# Altium PCB Motherboard Right.PcbDoc
Units mil, origin at the board's own origin, x right, y up, seen from the top; angles counter-clockwise.
Board outline 5470 x 4386.98 mil, 2 copper layers (Top Layer, Bottom Layer), stack 39.4 mil thick; 68 components, 42 nets, 293 pads, 53 vias.
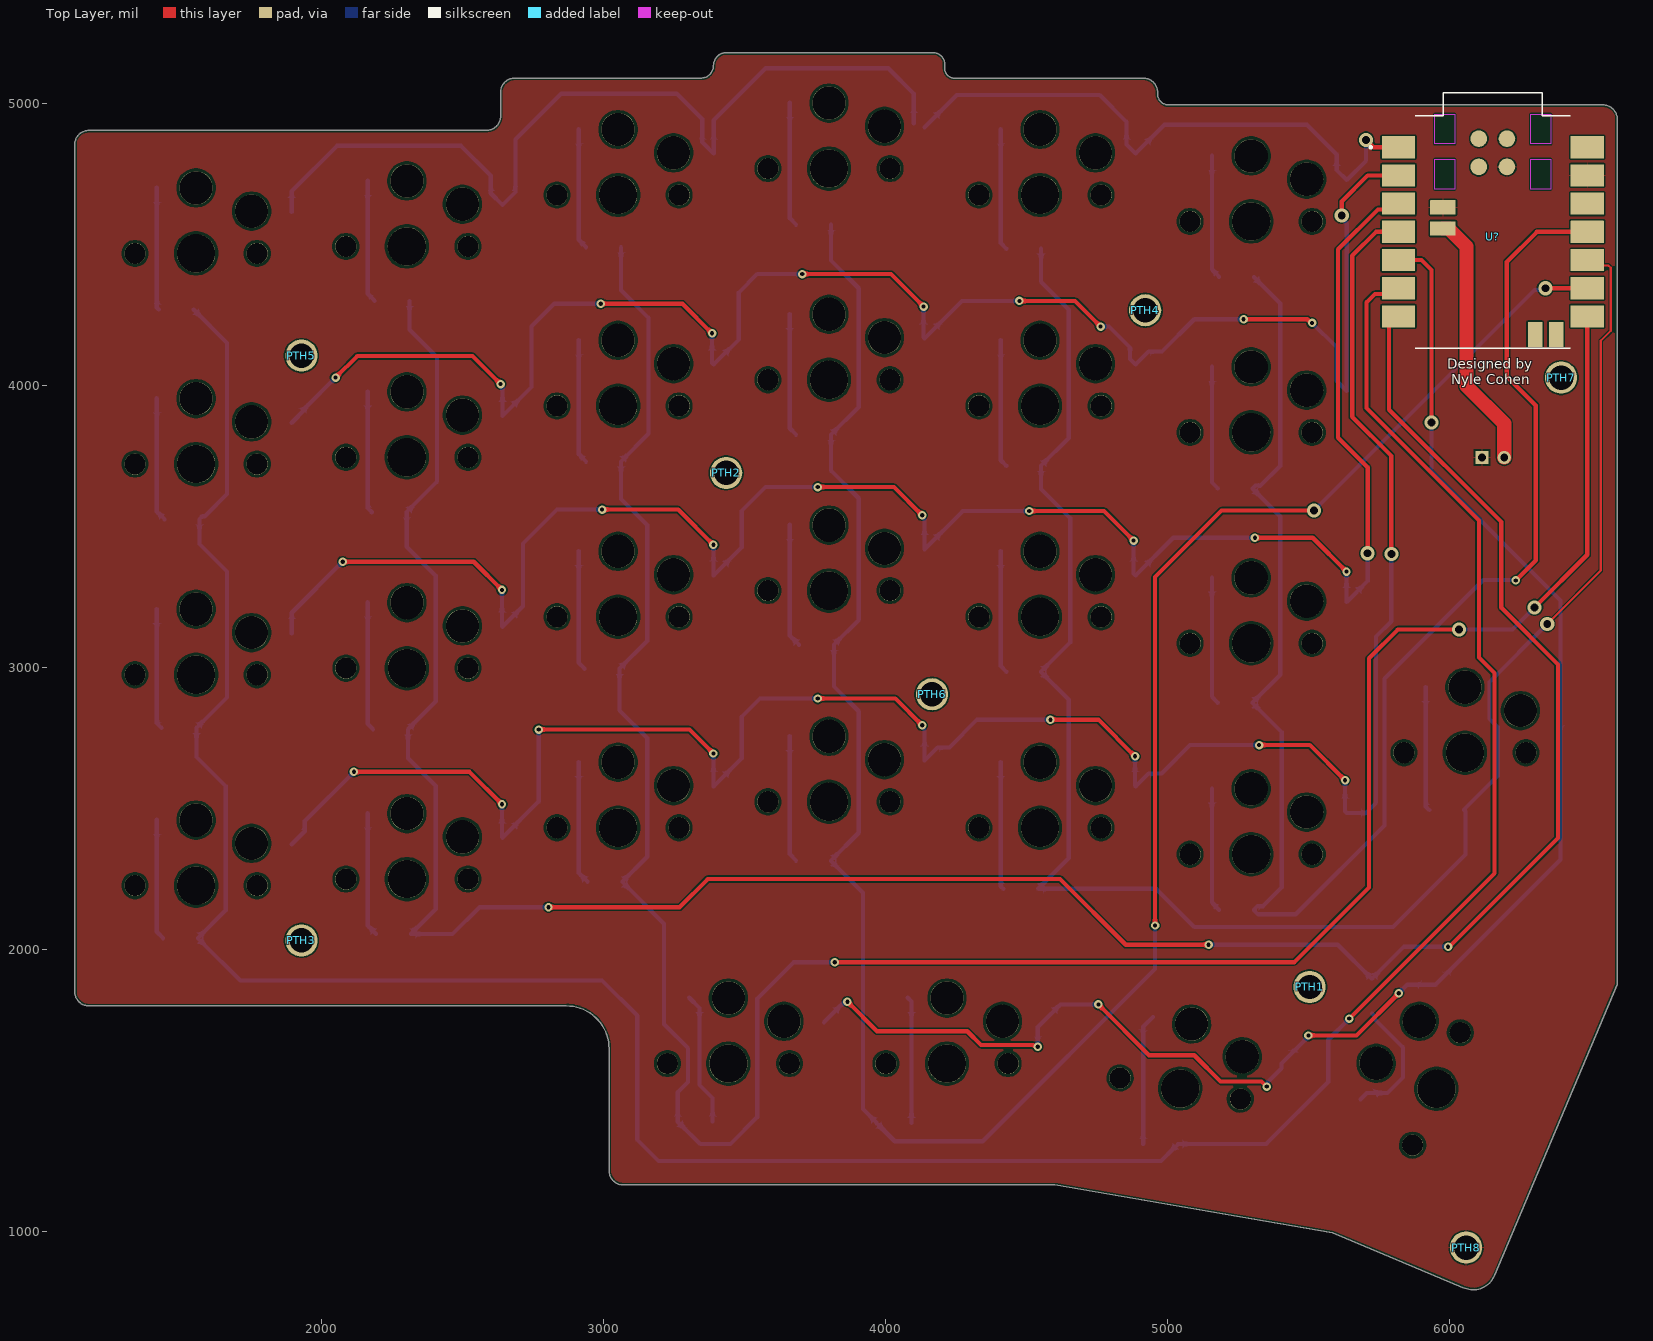
[diagram p0: Top Layer view]
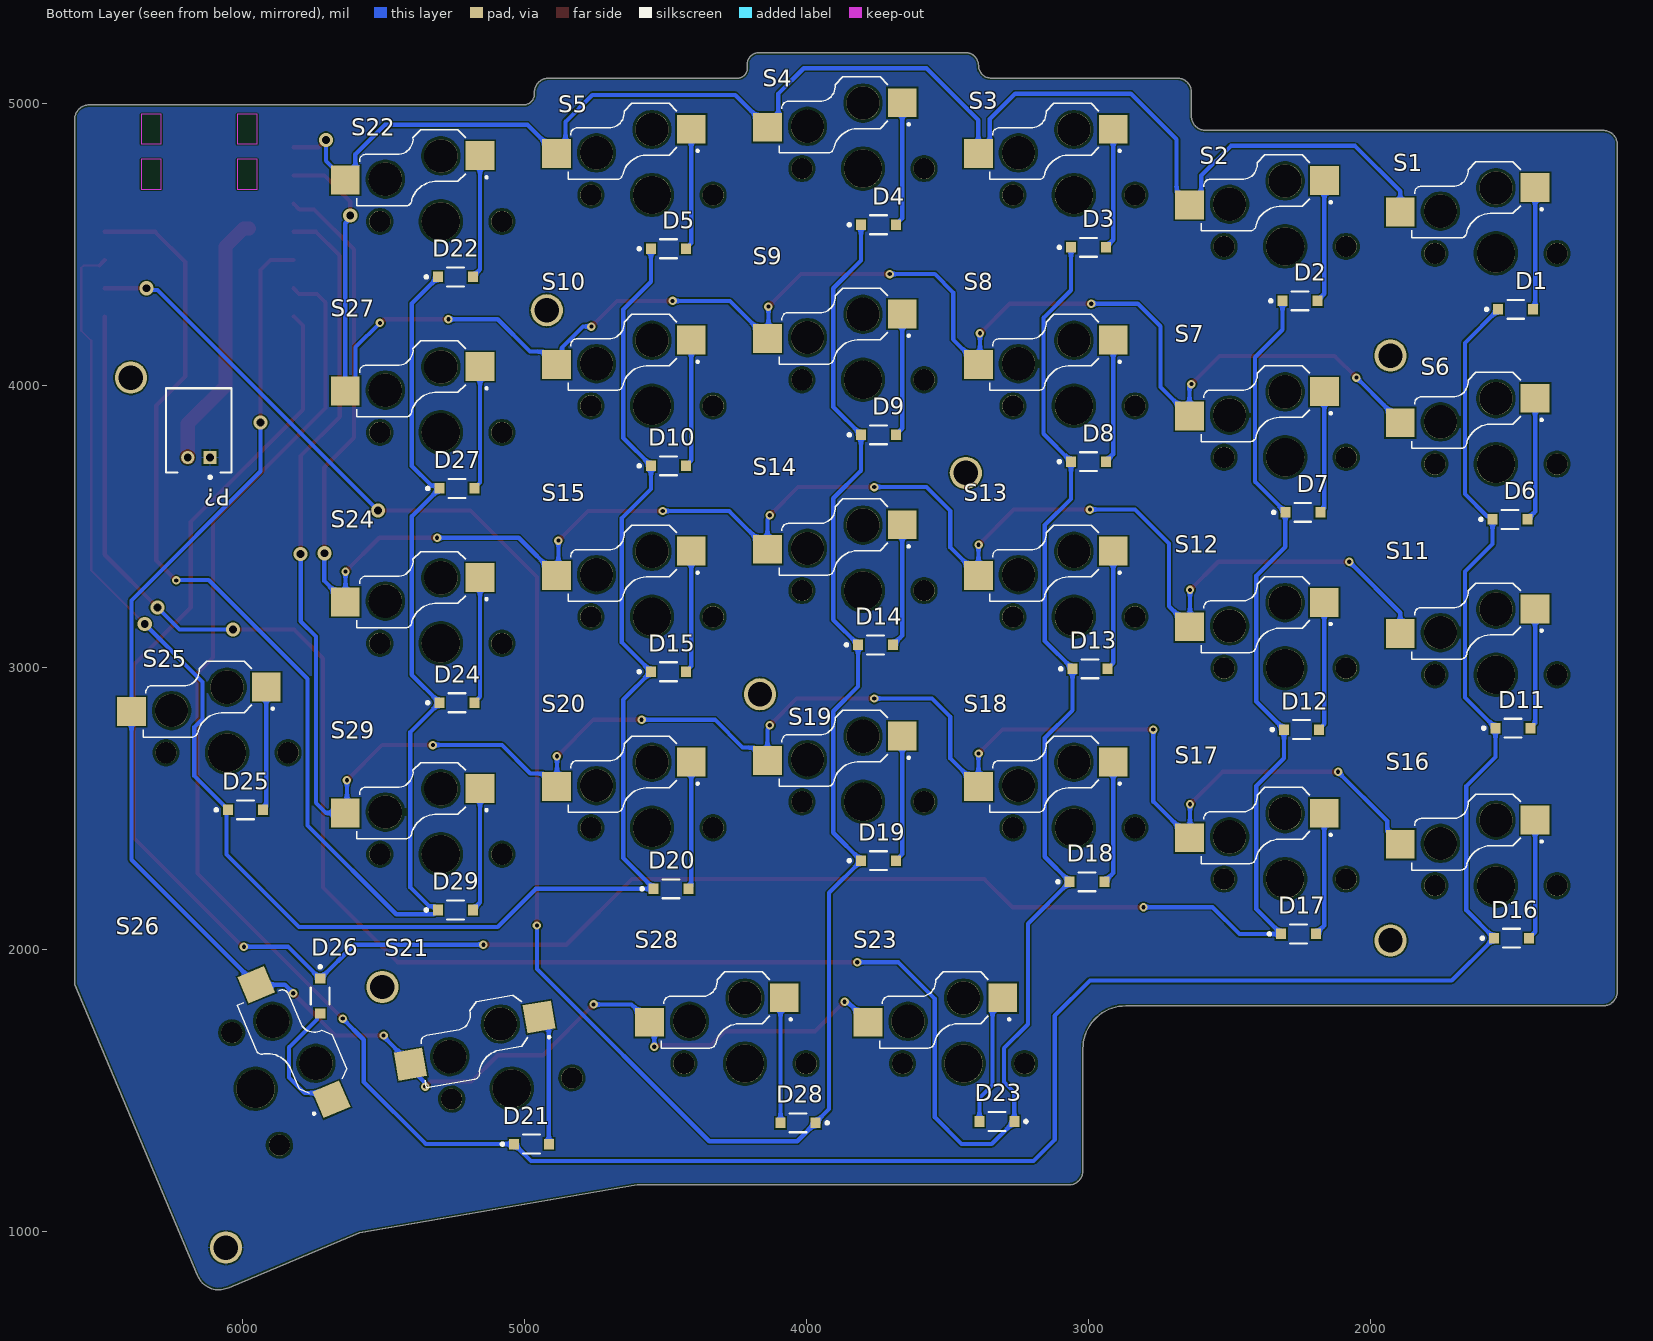
[diagram p1: Bottom Layer view, seen from below]
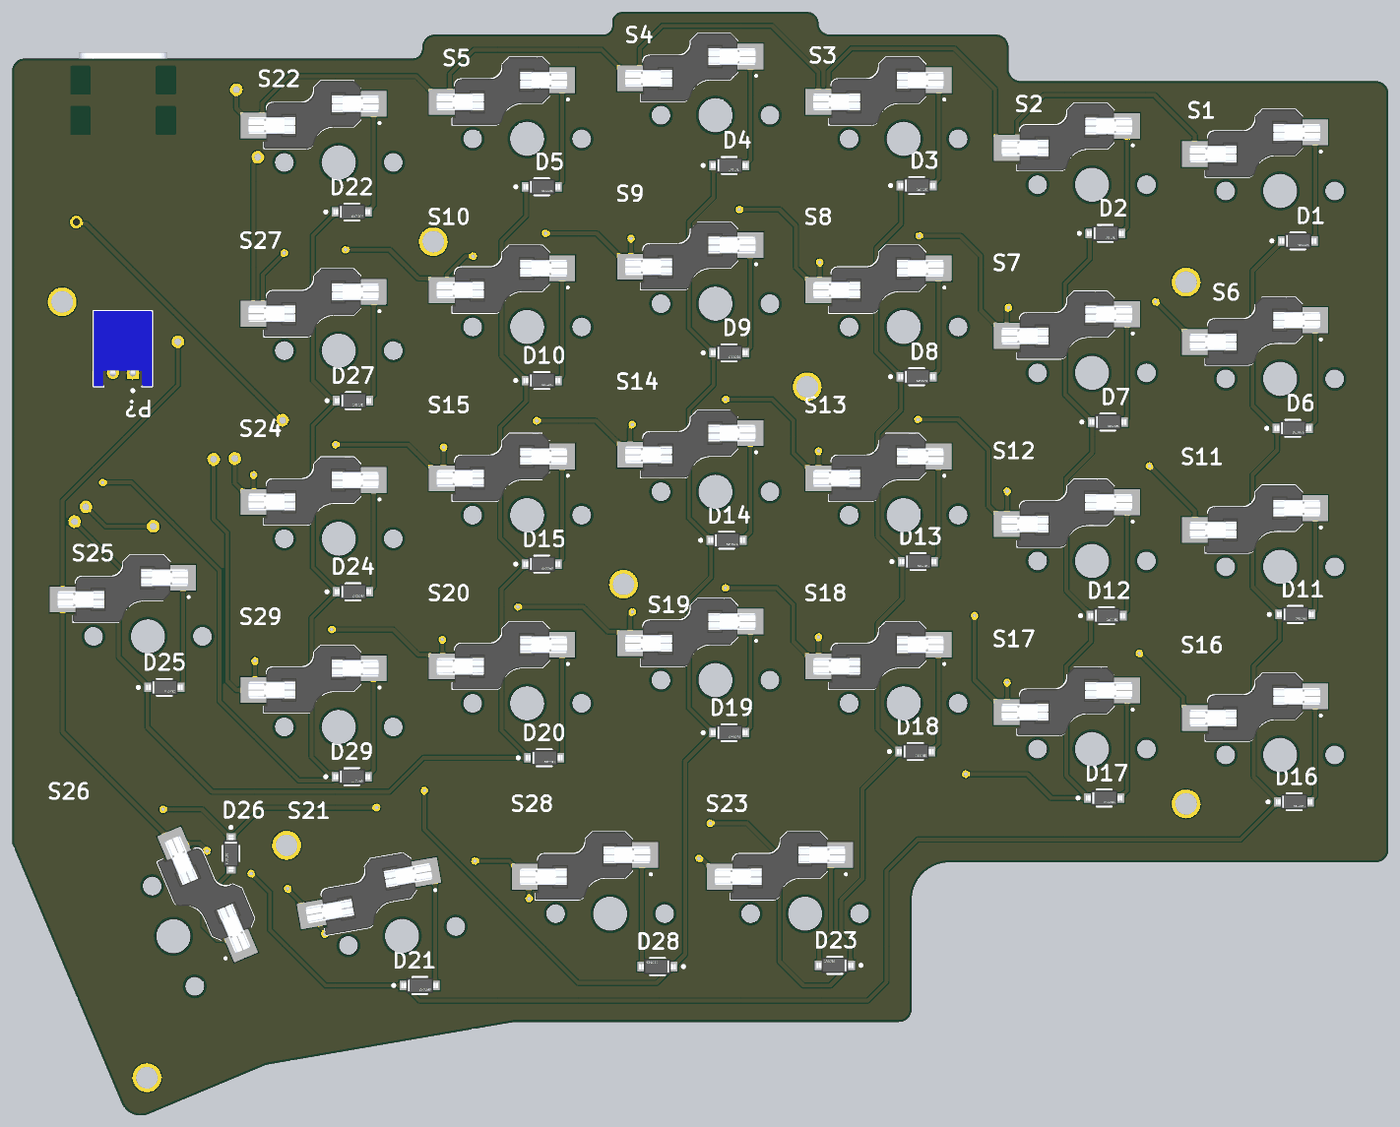
[diagram p2: 3D render of the assembled board from below, using the file's embedded part models]

## Layer stack, top to bottom
Top Solder: solder mask 0.4, Solder Resist, Dk 3.5
Top Layer: signal copper 1.4
Dielectric 1: dielectric 36.6, FR-4, Dk 4.4
Bottom Layer: signal copper 1.4
Bottom Solder: solder mask 0.4, Solder Resist, Dk 3.5

## Board outline
1175,1800 cw(c1175,1850) 1125,1850 1125,4855 cw(c1175,4855) 1175,4905 2585,4905 ccw(c2585,4955) 2635,4955 2635,5040 cw(c2685,5040) 2685,5090 3345,5090 ccw(c3345,5135) 3390,5135 cw(c3435,5135) 3435,5180 4170,5180 cw(c4170,5140) 4210,5140 4210,5125 ccw(c4245,5125) 4245,5090 4915,5090 cw(c4915,5040) 4965,5040 4965,5035 ccw(c5005,5035) 5005,4995 6545,4995 cw(c6545,4945) 6595,4945 6595,1876.24 6160.46,845.21 cw(c6084,875.08) 6048.51,801.07 5585,995 4600,1165 3070,1165 cw(c3070,1215) 3020,1215 3020,1647.95 ccw(c2867.95,1647.95) 2867.95,1800

## Design rules (kind name [scope] priority, off if disabled: settings)
BoardOutlineClearance [All] p1: gap=7.87 ignorepadtopadclearanceinfootprint=FALSE
Clearance [All] p1: gap=5 ignorepadtopadclearanceinfootprint=TRUE except(10: Arc-Hole Track-Hole SMDPad-Hole THPad-Hole Via-Hole Fill-Hole Poly-Hole Region-Hole Text-Hole)
ComponentClearance [All] p1: gap=5 collisioncheckmode=3 verticalgap=5 showdistances=TRUE
DiffPairsRouting [All] p1: maxlimit=100 minlimit=5 mostfreqgap=9.37 toplayer_minwidth=5 toplayer_maxwidth=100 toplayer_prefwidth=31.57 bottomlayer_minwidth=5 bottomlayer_maxwidth=100 bottomlayer_prefwidth=31.57 impedanceprofiledriven=TRUE impedanceprofileid={D4E62B93-00E1-4489-9EE8-131CB804B821} impedanceprofilevalue=90.000000 maxuncoupledlength=500
Height [All] p1: minheight=0 maxheight=71497.94 prefheight=500
HoleSize [All] p1: absolutevalues=TRUE maxlimit=248.03 minlimit=11.81 maxpercent=80.000 minpercent=20.000
HoleToHoleClearance [All] p1: gap=10 allowstackedmicrovias=FALSE
MinimumAnnularRing [All] p1: minimumring=6
MinimumSolderMaskSliver [All] p1: minsoldermaskwidth=6
PlaneClearance [All] p1: clearance=5
PlaneConnect PlaneConnectPowerPads [InPadClass('PowerPads')] p1: planeconnectstyle=Direct reliefexpansion=20 reliefentries=4 reliefconductorwidth=10 reliefairgap=10
PlaneConnect [All] p2: pad.planeconnectstyle=Relief pad.reliefexpansion=11.81 pad.reliefentries=4 pad.reliefconductorwidth=5 pad.reliefairgap=5 via.planeconnectstyle=Direct via.reliefexpansion=11.81 via.reliefentries=4 via.reliefconductorwidth=5 via.reliefairgap=5
PolygonConnect PolygonConnectPowerPads [All vs (InPadClass('PowerPads'))] p1: connectstyle=Direct reliefconductorwidth=10 reliefentries=4 polygonreliefangle="90 Angle" airgapwidth=10
PolygonConnect [All] p2: thpad.connectstyle=Relief thpad.reliefconductorwidth=5 thpad.reliefentries=4 thpad.polygonreliefangle="90 Angle" thpad.airgapwidth=5 smdpad.connectstyle=Relief smdpad.reliefconductorwidth=5 smdpad.reliefentries=4 smdpad.polygonreliefangle="90 Angle" smdpad.airgapwidth=5 via.connectstyle=Direct via.reliefconductorwidth=5 via.reliefentries=4 via.polygonreliefangle="90 Angle" via.airgapwidth=5
RoutingVias [All] p1: holewidth=11.81 width=23.62 viastyle="Through Hole" minholewidth=11.81 minwidth=23.62 maxholewidth=23.62 maxwidth=259.84
SilkToSilkClearance [All] p1: silktosilkclearance=5
SilkToSolderMaskClearance [IsPad] p1: minsilkscreentomaskgap=5 clearancetoexposedcopper=TRUE
SolderMaskExpansion [All] p1: expansion=2 istentingtop=FALSE
SupplyNets "Schematic Supply Nets_2" [InNet('GND')] p1: voltage=0.000
UnRoutedNet [All] p1: checkbadconnections=TRUE
Width Width_10mil [All] p1: maxlimit=1000 minlimit=8 preferedwidth=10 minimp=50.000000 maximp=50.000000 favimp=50.000000
Width Width_6mil [All] p2: maxlimit=1000 minlimit=6 preferedwidth=6 minimp=50.000000 maximp=50.000000 favimp=50.000000
Width Power_20mil [All] p3: maxlimit=1000 minlimit=20 preferedwidth=20 minimp=50.000000 maximp=50.000000 favimp=50.000000
Width Power_12mil [All] p4: maxlimit=1000 minlimit=12 preferedwidth=12 minimp=50.000000 maximp=50.000000 favimp=50.000000
Width Width_5mil [All] p5: maxlimit=1000 minlimit=5 preferedwidth=5 minimp=50.000000 maximp=50.000000 favimp=50.000000
Width [All] p6: maxlimit=100 minlimit=5 preferedwidth=10 minimp=50.000000 maximp=50.000000 favimp=50.000000
19 further rules are at their usual default settings.

## Classes and differential pairs
component class RP2040: P? U?

## Components (designator, comment, footprint, x,y, rotation, side; value= is the part's Value field where it differs from the comment)
D1 "1N4148W-13-F" FP-SOD123-MFG 1485,4270 r180 bottom value=2pF
D2 "1N4148W-13-F" FP-SOD123-MFG 2250,4300 r180 bottom value=2pF
D3 "1N4148W-13-F" FP-SOD123-MFG 3000,4490 r180 bottom value=2pF
D4 "1N4148W-13-F" FP-SOD123-MFG 3745,4570 r180 bottom value=2pF
D5 "1N4148W-13-F" FP-SOD123-MFG 4490,4485 r180 bottom value=2pF
D6 "1N4148W-13-F" FP-SOD123-MFG 1505,3525 r180 bottom value=2pF
D7 "1N4148W-13-F" FP-SOD123-MFG 2240,3550 r180 bottom value=2pF
D8 "1N4148W-13-F" FP-SOD123-MFG 3000,3730 r180 bottom value=2pF
D9 "1N4148W-13-F" FP-SOD123-MFG 3745,3825 r180 bottom value=2pF
D10 "1N4148W-13-F" FP-SOD123-MFG 4490,3715 r180 bottom value=2pF
D11 "1N4148W-13-F" FP-SOD123-MFG 1495,2785 r180 bottom value=2pF
D12 "1N4148W-13-F" FP-SOD123-MFG 2245,2780 r180 bottom value=2pF
D13 "1N4148W-13-F" FP-SOD123-MFG 2995,2995 r180 bottom value=2pF
D14 "1N4148W-13-F" FP-SOD123-MFG 3755,3080 r180 bottom value=2pF
D15 "1N4148W-13-F" FP-SOD123-MFG 4490,2985 r180 bottom value=2pF
D16 "1N4148W-13-F" FP-SOD123-MFG 1500,2040 r180 bottom value=2pF
D17 "1N4148W-13-F" FP-SOD123-MFG 2255,2055 r180 bottom value=2pF
D18 "1N4148W-13-F" FP-SOD123-MFG 3005,2240 r180 bottom value=2pF
D19 "1N4148W-13-F" FP-SOD123-MFG 3745,2315 r180 bottom value=2pF
D20 "1N4148W-13-F" FP-SOD123-MFG 4480,2215 r180 bottom value=2pF
D21 "1N4148W-13-F" FP-SOD123-MFG 4975,1310 r180 bottom value=2pF
D22 "1N4148W-13-F" FP-SOD123-MFG 5245,4385 r180 bottom value=2pF
D23 "1N4148W-13-F" FP-SOD123-MFG 3325,1390 r0 bottom value=2pF
D24 "1N4148W-13-F" FP-SOD123-MFG 5240,2875 r180 bottom value=2pF
D25 "1N4148W-13-F" FP-SOD123-MFG 5990,2495 r180 bottom value=2pF
D26 "1N4148W-13-F" FP-SOD123-MFG 5725,1835 r270 bottom value=2pF
D27 "1N4148W-13-F" FP-SOD123-MFG 5240,3635 r180 bottom value=2pF
D28 "1N4148W-13-F" FP-SOD123-MFG 4030,1385 r0 bottom value=2pF
D29 "1N4148W-13-F" FP-SOD123-MFG 5245,2140 r180 bottom value=2pF
P? "S2B-PH-K-S(LF)(SN)" JST-S2B-PH-K-S_V 6155,3841 r0 bottom
PTH1 "M2_Mount" Mounting_Holes#1 5565,1870 r90 top
PTH2 "M2_Mount" Mounting_Holes#2 3435,3690 r90 top
PTH3 "M2_Mount" Mounting_Holes#3 1885,2040 r90 top
PTH4 "M2_Mount" Mounting_Holes#4 5490,4410 r90 top
PTH5 "M2_Mount" Mounting_Holes#5 1870,4205 r90 top
PTH6 "M2_Mount" Mounting_Holes#6 4150,2980 r90 top
PTH7 "M2_Mount" Mounting_Holes#2 6396,4028 r90 top
PTH8 "M2_Mount" Mounting_Holes#2 6059,943 r90 top
S1 "5118" SW_5118 1555.12,4468.5 r0 bottom
S2 "5118" SW_5118 2302.83,4493.19 r0 bottom
S3 "5118" SW_5118 3051.55,4675.69 r0 bottom
S4 "5118" SW_5118 3799.65,4769.44 r0 bottom
S5 "5118" SW_5118 4547.98,4675.69 r0 bottom
S6 "5118" SW_5118 1555.12,3721.5 r0 bottom
S7 "5118" SW_5118 2302.83,3745.39 r0 bottom
S8 "5118" SW_5118 3051.55,3927.72 r0 bottom
S9 "5118" SW_5118 3799.65,4020.39 r0 bottom
S10 "5118" SW_5118 4547.98,3927.72 r0 bottom
S11 "5118" SW_5118 1555.12,2974.31 r0 bottom
S12 "5118" SW_5118 2303,2997.72 r0 bottom
S13 "5118" SW_5118 3051.55,3179.72 r0 bottom
S14 "5118" SW_5118 3799.65,3272.72 r0 bottom
S15 "5118" SW_5118 4547.98,3179.72 r0 bottom
S16 "5118" SW_5118 1555.12,2226.39 r0 bottom
S17 "5118" SW_5118 2303,2249.72 r0 bottom
S18 "5118" SW_5118 3051.55,2431.72 r0 bottom
S19 "5118" SW_5118 3799.65,2523.72 r0 bottom
S20 "5118" SW_5118 4547.98,2431.69 r0 bottom
S21 "5118" SW_5118 5045.16,1506.85 r350 bottom
S22 "5118" SW_5118 5296.7,4581.94 r0 bottom
S23 "5118" SW_5118 3443.15,1595.39 r0 bottom
S24 "5118" SW_5118 5296.7,3085.72 r0 bottom
S25 "5118" SW_5118 6055,2697.72 r0 bottom
S26 "5118" SW_5118 5953.81,1505.65 r67 bottom
S27 "5118" SW_5118 5296.7,3833.72 r0 bottom
S28 "5118" SW_5118 4218.15,1595.39 r0 bottom
S29 "5118" SW_5118 5296.7,2337.72 r0 bottom
U? "102010448" MODULE_102010448 6154,4545 r0 top

## Footprints (in the part's own frame and the unit in brackets; to place one, negate y for a bottom-side part, rotate by r counter-clockwise, add the part's x,y. Pads: shape width x height; smd on the part's side, far side on the other; paste and mask are expansions set on the pad)
FP-SOD123-MFG [mm]
  rect 0.9x0.95 smd paste+0 mask+0: 1(-1.575,0) 2(1.575,0)
  silkscreen extent -2.75,-0.85 0.75,0.85, body extent -1.85,-0.77 1.85,0.77, height 1.45
JST-S2B-PH-K-S_V [mm] "THD, 2-Leads, Body 7.6x5.9mm, Pitch 2mm"
  rect 1.2x1.2 hole 0.7: 1(-1,2.45)
  round 1.2 hole 0.7: 2(1,2.45)
  silkscreen extent -2.95,-3.8 2.95,4.35, body extent -2.95,-3.8 2.95,3.8, height 4.8
MODULE_102010448 [mm]
  rrect3% 3x2 smd: 0(-8.5,7.62) 1(-8.5,5.08) 2(-8.5,2.54) 3(-8.5,0) 3V3(8.5,2.54) 4(-8.5,-2.54) 5(-8.5,-5.08) 6(-8.5,-7.62) 7(8.5,-7.62) 8(8.5,-5.08) 9(8.5,-2.54) 10(8.5,0) GND(8.5,5.08) VUSB(8.5,7.62)
  rrect4% 2.3x1.3 smd: BAT_N(-4.5,2.2) BAT_P(-4.5,0.3)
  rrect4% 1.3x2.3 smd: NFC1(3.8,-9.25) NFC2(5.7,-9.25)
  round 1.5 smd: TP1(1.27,5.85) TP2(-1.27,5.85) TP3(1.27,8.39) TP5(-1.27,8.39)
  Keep-Out Layer region: 5.197,7.915 3.419,7.915 3.419,10.582 5.197,10.582
  Keep-Out Layer region: 5.197,3.851 3.419,3.851 3.419,6.518 5.197,6.518
  Keep-Out Layer region: -3.439,3.851 -5.217,3.851 -5.217,6.518 -3.439,6.518
  Keep-Out Layer region: -3.439,7.915 -5.217,7.915 -5.217,10.582 -3.439,10.582
  silkscreen extent -11.1,-10.48 6.98,12.52, body extent -8.89,-10.48 8.89,12, height 4.46
Mounting_Holes#1 [mm]
  round 2.9 hole 2.2: 1(-0.076,1.549)
Mounting_Holes#2 [mm]
  round 2.9 hole 2.2: 1(0,0)
Mounting_Holes#3 [mm]
  round 2.9 hole 2.2: 1(-0.203,-1.118)
Mounting_Holes#4 [mm]
  round 2.9 hole 2.2: 1(-3.632,14.453)
Mounting_Holes#5 [mm]
  round 2.9 hole 2.2: 1(-2.515,-1.499)
Mounting_Holes#6 [mm]
  round 2.9 hole 2.2: 1(-1.905,-0.381)
SW_5118 [mm]
  rect 2.6x2.6 smd: 1(-3.535,-5.926) 2(8.615,-3.726)
  round 1.902 hole 1.902 unplated: ""(-5.5,0) ""(5.5,0)
  round 3 hole 3 unplated: ""(0,-5.9) ""(5,-3.8)
  round 3.452 hole 3.452 unplated: ""(0,0)
  silkscreen extent -4.21,-8.25 7.56,-1.4, body extent -4.04,-8.25 9.12,-1.4, height 1.85

## Part data
D1 D2 D3 D4 D5 D6 D7 D8 D9 D10 D11 D12 D13 D14 D15 D16 D17 D18 D19 D20 D21 D22 D23 D24 D25 D26 D27 D28 D29: library part CMP-12791-000005-1, "DIODE GEN PURP 100V 150MA SOD123", Capacitance=2pF, Forward Current=300mA, Manufacturer="Diodes Inc.", Max Junction Temp=+150°C, Max Repetitive Reverse Voltage=100V, Max Surge Forward Current=1A, Package=SOD123, Peak Reverse Current=1uA, Temperature="-65°C to +150°C", Temperature Range Low=-65°C, Automotive=No, Category=Diode, ComponentLink2Description=Datasheet, ComponentLink2URL=https://upverter.com/datasheet/628e7d6fee5901eee6eef4567d1c3569f2cd3cde.pdf, Device Class L1="Discrete Semiconductors", Device Class L2=Diodes, Device Class L3="Rectifier Diodes", Digikey Description="DIODE GEN PURP 100V 150MA SOD123", Footprint Url=https://www.diodes.com/assets/Package-Files/SOD123.pdf, Height=1.45mm, Lead Free=Yes, Manufacturer Part Number=1N4148W-13-F, Mouser Description="1N4148W Series 2 A 100 V 400 mW Surface Mount Fast Switching Diode - SOD-123", Octopart=https://octopart.com/1n4148w-13-f-diodes+inc.-2359612, Reverse Voltage=100V, RoHS=TRUE, Standoff Height=0mm, Temperature Range High=+150°C
P?: library part CMP-1755-00004-1, "Male Header, Pitch 2 mm, 1 x 2 Position, Height 4.8 mm, Tail Length 3.4 mm, -25 to 85 degC, RoHS, Bulk", Capacitance="10 uF", Case\Package=Radial, Max Operating Temperature="85 degC", Min Operating Temperature="-40 degC", Package Quantity=200, Tolerance=20%, Voltage Rating="50 V", ComponentLink1Description=Datasheet, ComponentLink1URL=http://www.jst-mfg.com/product/pdf/eng/ePH.pdf, DatasheetVersion=Dec-12, Diameter="5 mm", Height="11 mm", Lead Pitch="2 mm", Length="11 mm", Mount="Through Hole", PackageDescription="Male Header, Pitch 2 mm, 1 x 2 Position, Height 4.8 mm, Tail Length 3.4 mm", PackageReference=S2B-PH-K-S, Packaging=Bulk, Pins=2, Radiation Hardening=No, REACH SVHC="No SVHC", RoHSCompliant=true, Voltage Rating (DC)="50 V"
S1 S2 S3 S4 S5 S6 S7 S8 S9 S10 S11 S12 S13 S14 S15 S16 S17 S18 S19 S20 S21 S22 S23 S24 S25 S26 S27 S28 S29: "SWITCH SKT FOR KAILH CHOC 1=10PC", Package="NON STANDARD-2 Adafruit", Check_prices=https://www.snapeda.com/parts/5118/Adafruit+Industries/view-part/?ref=eda, MF="Adafruit Industries LLC", MP=5118, SnapEDA_Link=https://www.snapeda.com/parts/5118/Adafruit+Industries/view-part/?ref=snap
U?: "- nRF52840 Transceiver; Bluetooth® 5.x Evaluation Board", Package=None, Check_prices=https://www.snapeda.com/parts/102010448/Seeed+Technology+Co.%252C+Ltd/view-part/?ref=eda, MF="Seeed Technology Co., Ltd", MP=102010448, SnapEDA_Link=https://www.snapeda.com/parts/102010448/Seeed+Technology+Co.%252C+Ltd/view-part/?ref=snap

## Via types
v1: diameter 30, hole 15, Top Layer to Bottom Layer, 43 vias
v2: diameter 50, hole 28, Top Layer to Bottom Layer, 10 vias

## Nets (pads, with @x,y where several pads share a name; then routed paths per layer and width w, separated by ;. In a path a pad name is that pad's centre, name@x,y a point inside that pad or via, vN(x,y) a via of type N, cw(c..) or ccw(c..) an arc to the next point about the centre after c; other vN are vias at no path point)
GND: P?.1 PTH8.1 U?.BAT_N U?.GND U?.TP1
NetD1_1: D1.1 D6.1 D11.1 D16.1 D21.1 U?.5 | length 10534.9
  Top Layer w15: v1(5645,1755) 6160,2270 6160,2980 6105,3035 6105,3521 5706,3920 5706,4295 5736,4325 5799.35,4325 U?.5
  Bottom Layer w15: D1.1 1547.01,4269.02 1665,4151.02 1665,3615 1586.2,3536.2 1577.22,3536.2 1567.01,3525.98 D6.1 1567.01,3437.99 1665,3340 1665,2893.98 1557.01,2785.98 D11.1 1557.01,2682.99 1660,2580 1660,2138.98 1562.01,2040.98 D16.1 1562.01,2039.02 1572.22,2028.8 1573.21,2028.8 1712.01,1890 2995,1890 3120,1765 3120,1325 3195,1250 4977.01,1250 5025.81,1298.8 5026.79,1298.8 5037.01,1309.02 D21.1 5350,1310 5570,1530 5570,1680 v1(5645,1755)
NetD1_2: D1.2 S1.1 | length 434.7
  Bottom Layer w15: S1.1 1415.94,4277.05 D1.2
NetD2_1: D2.1 D7.1 D12.1 D17.1 D26.1 U?.6 | length 9104.7
  Top Layer w15: v1(2805,2150) 3270,2150 3370,2250 4619,2250 4852,2017 v1(5146,2017) ; U?.6 5817.87,4245 5786,4213.13 5786,3914 6184,3516 6184,3212 6385,3011 6385,2395 6000,2010 v1(5995,2010)
  Bottom Layer w15: D2.1 2312.01,4197.99 2410,4100 2410,3658.98 2302.01,3550.98 D7.1 2302.01,3427.99 2405,3325 2405,2878.98 2307.01,2780.98 D12.1 2307.01,2677.99 2405,2580 2405,2143.98 2317.01,2055.98 D17.1 2465,2055 2560,2150 v1(2805,2150) ; v1(5146,2017) 5604.02,2017 5724.02,1897.01 5725.98,1897.01 5838.98,2010 v1(5995,2010)
NetD2_2: D2.2 S2.1 | length 436.6
  Bottom Layer w15: S2.1 2163.66,4325.31 2187.99,4300.98 D2.2
NetD3_1: D3.1 D8.1 D13.1 D18.1 D23.1 U?.7 | length 9141.7
  Top Layer w15: v1(3820,1955) 5450,1955 5715,2220 5715,3033 5817,3135 v2(6034,3135) ; v2(6302,3213) 6488.65,3399.65 U?.7
  Bottom Layer w15: D3.1 3062.01,4337.99 3160,4240 3160,3828.98 3062.01,3730.98 D8.1 3062.01,3597.99 3155,3505 3155,3093.98 3057.01,2995.98 D13.1 3057.01,2847.99 3155,2750 3155,2328.98 3067.01,2240.98 D18.1 3067.01,2239.02 3215,2091.02 3215,1735 3300,1650 3300,1530.35 3262.99,1493.35 D23.1 3262.99,1389.02 3275.71,1376.3 3276.69,1376.3 3342.99,1310 3450,1310 3545,1405 3545,1825 3675,1955 v1(3820,1955) ; v2(6034,3135) 6224,3135 v2(6302,3213)
NetD3_2: D3.2 S3.1 | length 429.6
  Bottom Layer w15: S3.1 2912.38,4516.6 2937.99,4490.98 D3.2
NetD4_1: D4.1 D9.1 D14.1 D19.1 D28.1 U?.8 | length 8102.3
  Top Layer w15: v1(4956,2085) 4956,3321 5192,3557 v2(5520,3557) ; v2(6340,4345) U?.8
  Bottom Layer w15: D4.1 3807.01,4442.99 3905,4345 3905,3923.98 3807.01,3825.98 D9.1 3807.01,3697.99 3905,3600 3905,3168.98 3817.01,3080.98 D14.1 3817.01,2932.99 3905,2845 3905,2413.98 3807.01,2315.98 D19.1 3807.01,2314.02 3920,2201.02 3920,1433.98 3967.99,1385.98 D28.1 3967.99,1384.02 3980.71,1371.3 3981.69,1371.3 4032.99,1320 4345,1320 4956,1931 v1(4956,2085) ; v2(5520,3557) 6301.3,4338.3 6333.3,4338.3 v2(6340,4345)
NetD4_2: D4.2 S4.1 | length 442.1
  Bottom Layer w15: S4.1 3660.47,4593.5 3682.99,4570.98 D4.2
NetD5_1: D5.1 D10.1 D15.1 D20.1 D25.1 U?.9 | length 6615.7
  Top Layer w8: v2(6347,3154) 6537,3344 6537,4159 6572,4194 6572,4417.21 6563.21,4426 U?.9@6507.65,4426
  Top Layer w15: U?.9 U?.9@6507.65,4426
  Bottom Layer w15: D5.1 4552.01,4367.99 4650,4270 4650,3813.98 4552.01,3715.98 D10.1 4552.01,3632.99 4655,3530 4655,3088.98 4552.01,2985.98 D15.1 4552.01,2984.02 4650,2886.02 4650,2323.98 4542.01,2215.98 D20.1 4960,2215 5095,2080 5800,2080 6057.01,2337.01 6057.01,2490 D25.1 6052.01,2495.98 6171,2614.98 6171,2789 6142,2818 6142,2949 v2(6347,3154)
NetD5_2: D5.2 S5.1 | length 431.9
  Bottom Layer w15: S5.1 4408.81,4505.17 4427.99,4485.98 D5.2
NetD6_2: D6.2 S6.1 | length 441
  Bottom Layer w15: S6.1 1415.94,3553.03 1442.99,3525.98 D6.2
NetD7_2: D7.2 S7.1 | length 434.6
  Bottom Layer w15: S7.1 2163.66,3565.31 2177.99,3550.98 D7.2
NetD8_2: D8.2 S8.1 | length 441.6
  Bottom Layer w15: S8.1 2912.38,3756.6 2937.99,3730.98 D8.2
NetD9_2: D9.2 S9.1 | length 438
  Bottom Layer w15: S9.1 3660.47,3848.5 3682.99,3825.98 D9.2
NetD10_2: D10.2 S10.1 | length 454
  Bottom Layer w15: S10.1 4408.81,3735.17 4427.99,3715.98 D10.2
NetD11_2: D11.2 S11.1 | length 429.7
  Bottom Layer w15: S11.1 1415.94,2803.03 1432.99,2785.98 D11.2
NetD12_2: D12.2 S12.1 | length 459
  Bottom Layer w15: S12.1 2163.83,2800.15 2182.99,2780.98 D12.2
NetD13_2: D13.2 S13.1 | length 426.6
  Bottom Layer w15: S13.1 2912.38,3016.6 2932.99,2995.98 D13.2
NetD14_2: D14.2 S14.1 | length 439.5
  Bottom Layer w15: S14.1 3660.47,3113.5 3692.99,3080.98 D14.2
NetD15_2: D15.2 S15.1 | length 436
  Bottom Layer w15: S15.1 4408.81,3005.16 4427.99,2985.98 D15.2
NetD16_2: D16.2 S16.1 | length 428.8
  Bottom Layer w15: S16.1 1415.94,2063.03 1437.99,2040.98 D16.2
NetD17_2: D17.2 S17.1 | length 440.1
  Bottom Layer w15: S17.1 2163.83,2085.15 2192.99,2055.98 D17.2
NetD18_2: D18.2 S18.1 | length 437.7
  Bottom Layer w15: S18.1 2912.38,2271.6 2942.99,2240.98 D18.2
NetD19_2: D19.2 S19.1 | length 451.4
  Bottom Layer w15: S19.1 3660.47,2338.5 3682.99,2315.98 D19.2
NetD20_2: D20.2 S20.1 | length 453.8
  Bottom Layer w15: S20.1 4408.81,2224.18 D20.2
NetD21_2: D21.2 S21.1 | length 465.5
  Bottom Layer w15: D21.2 4913.8,1310.8 4913.8,1725.96 S21.1
NetD22_1: D22.1 D24.1 D27.1 D29.1 U?.10 | length 5771.9
  Top Layer w15: v1(6235,3309) 6306,3380 6306,3929 6203,4032 6203,4438 6310,4545 U?.10
  Bottom Layer w15: D22.1 5307.01,4384.02 5400,4291.02 5400,3715 5330,3645 5312.01,3645 D27.1 5302.01,3634.02 5400,3536.02 5400,2973.98 5302.01,2875.98 D24.1 5302.01,2874.02 5405,2771.02 5405,2220 5338.7,2153.7 5319.72,2153.7 5307.01,2140.98 D29.1 5307.01,2139.02 5319.72,2126.3 5320.71,2126.3 5322.01,2125 5455,2125 5770,2440 5770,2960 6120,3310 6234,3310 v1(6235,3309)
NetD22_2: D22.2 S22.1 | length 440.8
  Bottom Layer w15: S22.1 5157.53,4411.45 5182.99,4385.98 D22.2
NetD23_2: D23.2 S23.1 | length 473.1
  Bottom Layer w15: S23.1 3340,1792.68 3340,1520 3387.01,1472.99 D23.2
NetD24_2: D24.2 S24.1 | length 452.5
  Bottom Layer w15: S24.1 5157.53,2896.45 5177.99,2875.98 D24.2
NetD25_2: D25.2 S25.1 | length 441.1
  Bottom Layer w15: S25.1 5915.83,2507.17 D25.2
NetD26_2: D26.2 S26.1 | length 455.5
  Bottom Layer w15: S26.1 5706.79,1490.82 5779.82,1490.82 5835,1546 5835,1653 5736.2,1751.8 5736.2,1762.78 5725.98,1772.99 D26.2
NetD27_2: D27.2 S27.1 | length 440.5
  Bottom Layer w15: S27.1 5157.53,3656.45 5177.99,3635.98 D27.2
NetD28_2: D28.2 S28.1 | length 449.1
  Bottom Layer w15: S28.1 4092.01,1815.67 D28.2
NetD29_2: D29.2 S29.1 | length 441.6
  Bottom Layer w15: S29.1 5157.53,2166.45 5182.99,2140.98 D29.2
NetP?_2: P?.2 U?.BAT_P | length 913.9
  Top Layer w50: U?.BAT_P 5996.52,4556.81 6061,4492.33 6061,3998 6194.37,3864.63 P?.2
NetS1_2: S1.2 S2.2 S3.2 S4.2 S5.2 S22.2 U?.0 | length 5347.1
  Top Layer w15: v2(5704,4871) 5704.29,4871 5730.29,4845 U?.0
  Bottom Layer w15: S1.2 1894.29,4689.29 2055,4850 2495,4850 2600,4745 2600,4681.89 S2.2 2688.19,4686.06 2688.19,4873.19 2850,5035 3260,5035 3350,4945 3350,4863.11 S3.2 3390.72,4940.72 3575,5125 4010,5125 4100,5035 S4.2@4100,4930 ; S4.2 4252.69,5030 4760,5030 4855,4935 4855,4854.54 S5.2 4989.78,4925 5495,4925 5600,4820 5600,4764.5 S22.2 5704,4796.76 v2(5704,4871)
NetS6_2: S6.2 S7.2 S8.2 S9.2 S10.2 S27.2 U?.1 | length 6155.4
  Top Layer w15: v1(2050,4028) 2127,4105 2535,4105 v1(2635,4005) ; v1(2990,4290) 3280,4290 v1(3385,4185) ; v1(3705,4395) 4020,4395 v1(4135,4280) ; v1(4475,4300) 4672,4300 v1(4763,4209) ; v1(5270,4235) 5495.94,4235 5508.94,4222 v1(5513,4222) ; v2(5618,4603) 5618,4653 5710,4745 U?.1
  Bottom Layer w15: S6.2 1940.47,3914.37 1940.47,3918.47 v1(2050,4028) ; v1(2635,4005) 2635,3999.59 2642.01,3992.58 S7.2 2745,3995.08 2745,4210 2825,4290 v1(2990,4290) ; v1(3385,4185) 3385,4080.13 S8.2 3480,4163.69 3480,4330 3545,4395 v1(3705,4395) ; v1(4135,4280) 4135,4170.91 S9.2 4271.73,4300 v1(4475,4300) ; v1(4763,4209) 4793,4209 4867.27,4134.73 4867.27,4094.3 S10.2 4933.34,4120.59 4980.59,4120.59 5095,4235 v1(5270,4235) ; v1(5513,4222) 5599,4136 5599,4017.28 S27.2 5635.87,4575.66 5618,4593.53 v2(5618,4603)
NetS11_2: S11.2 S12.2 S13.2 S14.2 S15.2 S24.2 U?.2 | length 6922.9
  Top Layer w15: v1(2075,3375) 2540,3375 v1(2640,3275) ; v1(2995,3560) 3265,3560 v1(3390,3435) ; v1(3760,3640) 4030,3640 v1(4130,3540) ; v1(4510,3555) 4775,3555 v1(4880,3450) ; v1(5310,3460) 5515,3460 v1(5635,3340) ; v2(5710,3405) 5710,3710 5605,3815 5605,4483 5746.59,4624.59 5798.94,4624.59 U?.2
  Bottom Layer w15: S11.2 1894.29,3194.29 v1(2075,3375) ; v1(2640,3275) 2640,3146.58 S12.2 2715,3217.24 2715,3440 2835,3560 v1(2995,3560) ; v1(3390,3435) 3390,3327.13 S13.2 3490,3425.68 3490,3555 3575,3640 v1(3760,3640) ; v1(4130,3540) 4130,3534.59 4138.82,3525.77 S14.2 4274.41,3555 v1(4510,3555) ; v1(4880,3450) 4880,3333.57 S15.2 5020.75,3460 v1(5310,3460) ; v1(5635,3340) 5635,3233.28 S24.2 5710,3306.54 v2(5710,3405)
NetS16_2: S16.2 S17.2 S18.2 S19.2 S20.2 S29.2 U?.3 | length 7650.5
  Top Layer w15: v1(2115,2630) 2525,2630 v1(2640,2515) ; v1(2770,2780) 3305,2780 v1(3390,2695) ; v1(3760,2890) 4035,2890 v1(4130,2795) ; v1(4585,2815) 4755,2815 v1(4885,2685) ; v1(5325,2725) 5505,2725 v1(5630,2600) ; v2(5794,3402) 5794,3750 5655,3889 5655,4460 5740,4545 U?.3
  Bottom Layer w15: S16.2 1940.47,2419.27 1940.47,2455.47 v1(2115,2630) ; v1(2640,2515) 2640,2398.58 S17.2 2770,2524.24 v1(2770,2780) ; v1(3390,2695) 3390,2579.13 S18.2 3490,2677.68 3490,2825 3555,2890 v1(3760,2890) ; v1(4130,2795) 4130,2789.59 4138.82,2780.77 S19.2 4185,2716.59 4226.59,2716.59 4325,2815 v1(4585,2815) ; v1(4885,2685) 4885,2580.54 S20.2 4933.34,2624.57 4979.57,2624.57 5080,2725 v1(5325,2725) ; v1(5630,2600) 5630,2490.28 S29.2 5704.41,2484.41 5740,2520 5740,3110 5794,3164 v2(5794,3402)
NetS21_2: S21.2 S23.2 S25.2 S26.2 S28.2 U?.4 | length 5697.1
  Top Layer w15: v1(3865,1815) 3970,1710 4290,1710 4339,1661 4523.71,1661 4526.84,1657.87 4537.13,1657.87 v1(4540,1655) ; v1(4755,1805) 4935,1625 5095,1625 5187.9,1532.1 5333.88,1532.1 v1(5351.98,1514) ; v1(5500,1695) 5670,1695 v1(5820,1845) ; U?.4 5901,4445 5936,4410 v2(5936,3869)
  Bottom Layer w15: S23.2 3851.41,1811.17 3861.17,1811.17 v1(3865,1815) ; v1(4540,1655) 4540,1724.76 S28.2 4620.24,1805 v1(4755,1805) ; v1(5351.98,1514) 5354.85,1516.87 5354.85,1529.23 5404.65,1579.04 5404.65,1596.04 5500,1691.38 v1(5500,1695) ; v1(5820,1845) 5850.18,1875.18 S26.2 6394.17,2318.04 S25.2 6394.17,3237.83 5936,3696 v2(5936,3869)
pads on no net: PTH1.1 PTH2.1 PTH3.1 PTH4.1 PTH5.1 PTH6.1 PTH7.1 S1. S2. S3. S4. S5. S6. S7. S8. S9. S10. S11. S12. S13. S14. S15. S16. S17. S18. S19. S20. S21. S22. S23. S24. S25. S26. S27. S28. S29. U?.3V3 U?.NFC1 U?.NFC2 U?.TP2 U?.TP3 U?.TP5 U?.VUSB

## Polygon pours and split planes (outlines as drawn)
GND on Top Layer "GND_L01_P005" (solid, pour order 5): 1175,1800 cw(c1175,1850) 1125,1850 1125,4855 cw(c1175,4855) 1175,4905 2585,4905 ccw(c2585,4955) 2635,4955 2635,5040 cw(c2685,5040) 2685,5090 3345,5090 ccw(c3345,5135) 3390,5135 cw(c3435,5135) 3435,5180 4170,5180 cw(c4170,5140) 4210,5140 4210,5125 ccw(c4245,5125) 4245,5090 4915,5090 cw(c4915,5040) 4965,5040 4965,5035 ccw(c5005,5035) 5005,4995 6545,4995 cw(c6545,4945) 6595,4945 6595,1876.24 6160.46,845.21 cw(c6084,875.08) 6048.51,801.07 5585,995 4600,1165 3070,1165 cw(c3070,1215) 3020,1215 3020,1647.95 ccw(c2867.95,1647.95) 2867.95,1800
GND on Bottom Layer "GND_L02_P006" (solid, pour order 6): 1175,1800 cw(c1175,1850) 1125,1850 1125,4855 cw(c1175,4855) 1175,4905 2585,4905 ccw(c2585,4955) 2635,4955 2635,5040 cw(c2685,5040) 2685,5090 3345,5090 ccw(c3345,5135) 3390,5135 cw(c3435,5135) 3435,5180 4170,5180 cw(c4170,5140) 4210,5140 4210,5125 ccw(c4245,5125) 4245,5090 4915,5090 cw(c4915,5040) 4965,5040 4965,5035 ccw(c5005,5035) 5005,4995 6545,4995 cw(c6545,4945) 6595,4945 6595,1876.24 6160.46,845.21 cw(c6084,875.08) 6048.51,801.07 5585,995 4600,1165 3070,1165 cw(c3070,1215) 3020,1215 3020,1647.95 ccw(c2867.95,1647.95) 2867.95,1800

## Silkscreen, mask and mechanical layers (free items; w line width, h text height)
Top Overlay:
  text "Designed by" at 5992,4046.67 h60
  text "Nyle Cohen" at 6006.03,3991.67 h60
Mechanical 1:
  lines w10: 6079.9,845.04 6520.04,1880.37 ; 1125,1850 ccw(c1175,1850) 1175,1800 2867.95,1800 cw(c2867.95,1647.95) 3020,1647.95 3020,1215 ccw(c3070,1215) 3070,1165 4600,1165 5585,995 6048.51,801.07 ccw(c6084,875.08) 6160.46,845.21 6595,1876.24 6595,1940 6595,1955 6595,2000 6595,2030 6595,4945 ccw(c6545,4945) 6545,4995 5005,4995 cw(c5005,5035) 4965,5035 4965,5040 ccw(c4915,5040) 4915,5090 4245,5090 cw(c4245,5125) 4210,5125 4210,5140 ccw(c4170,5140) 4170,5180 3435,5180 ccw(c3435,5135) 3390,5135 cw(c3345,5135) 3345,5090 2685,5090 ccw(c2685,5040) 2635,5040 2635,4955 cw(c2585,4955) 2585,4905 1925,4905 1175,4905 ccw(c1175,4855) 1125,4855 1125,1850 ; 5389.62,1138.05 5829.19,2173.62 6519.57,1880.57 6080,845 5389.62,1138.05